# Altium PCB Copy-of-PCB1.pcbdoc
Units mm, origin at the board's own origin, x right, y up, seen from the top; angles counter-clockwise.
Board outline 151.76 x 115.06 mm, 2 copper layers (Top Layer, Bottom Layer); 14 components, 7 nets, 30 pads, 3 vias.
Unrouted connection lines stored in the file: 15.
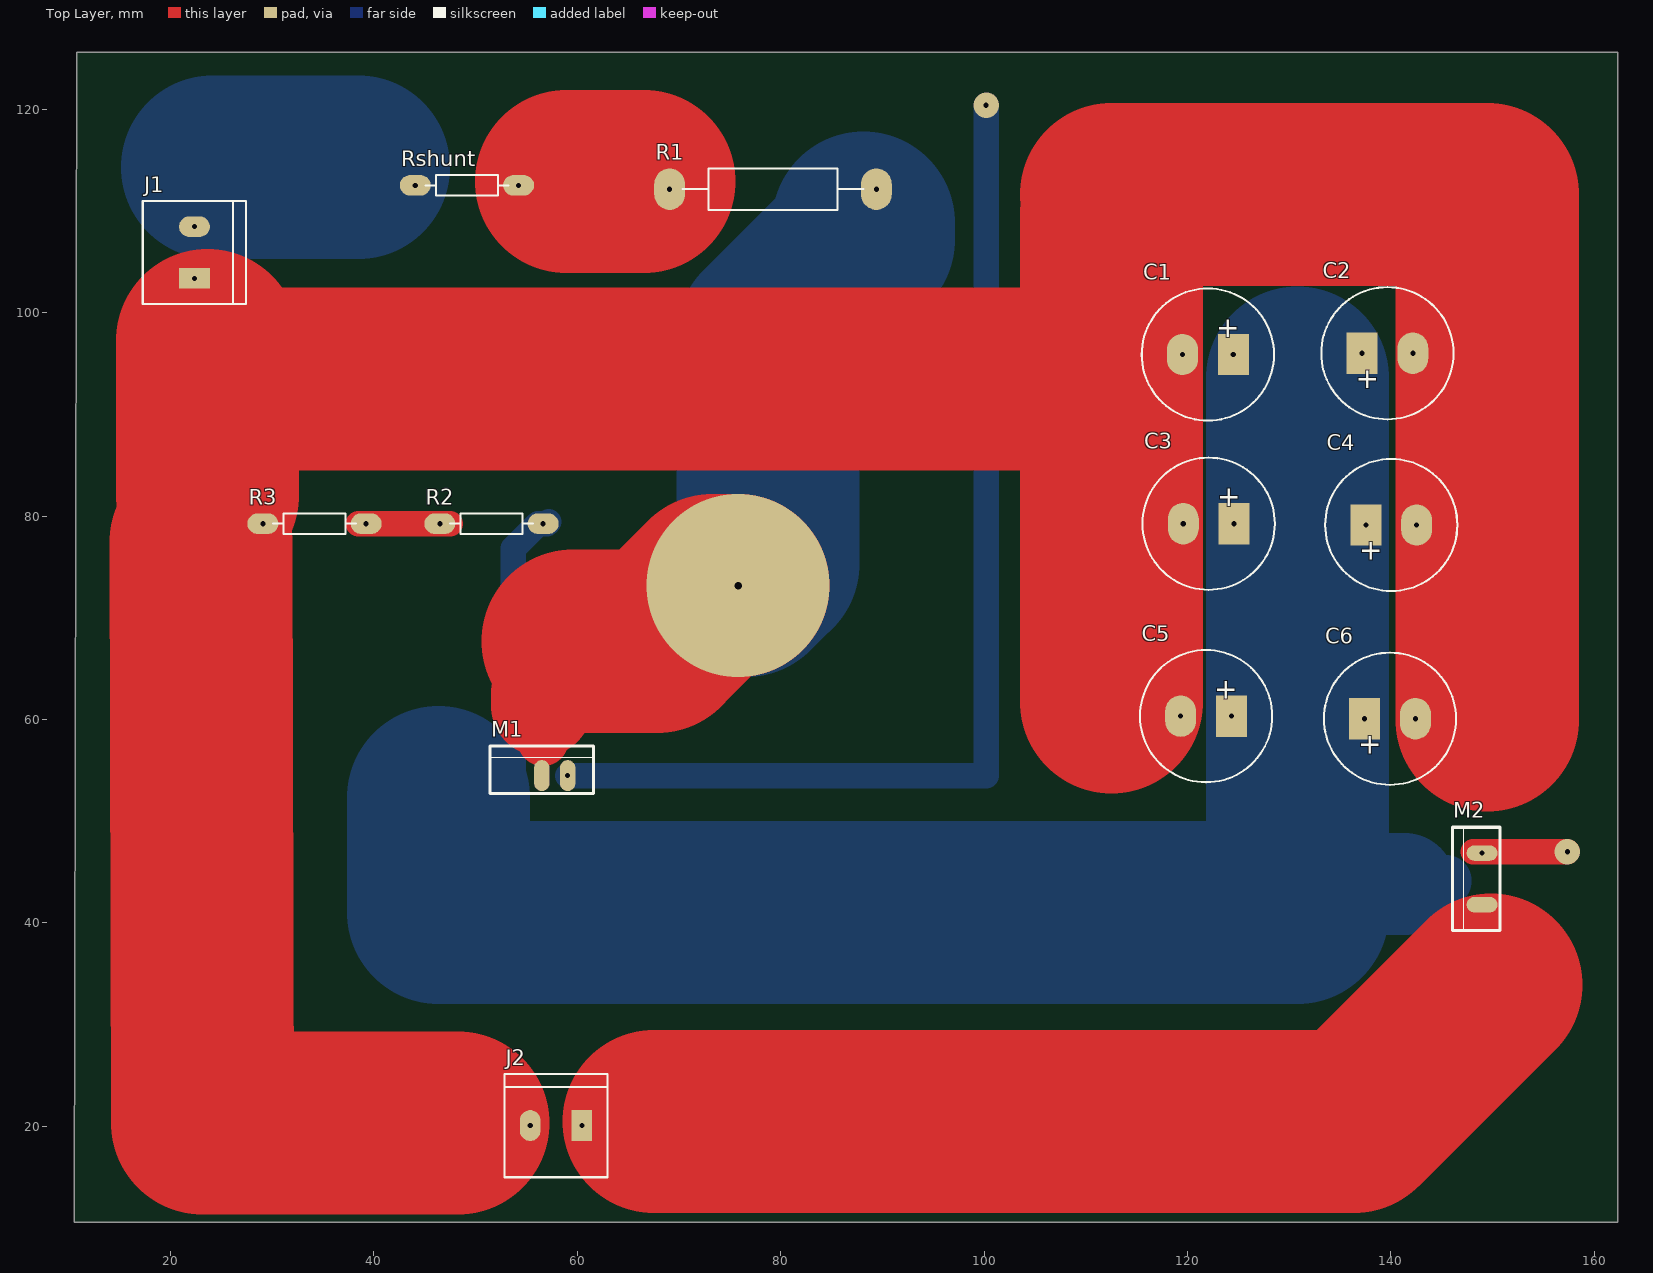
[diagram p0: Top Layer view]
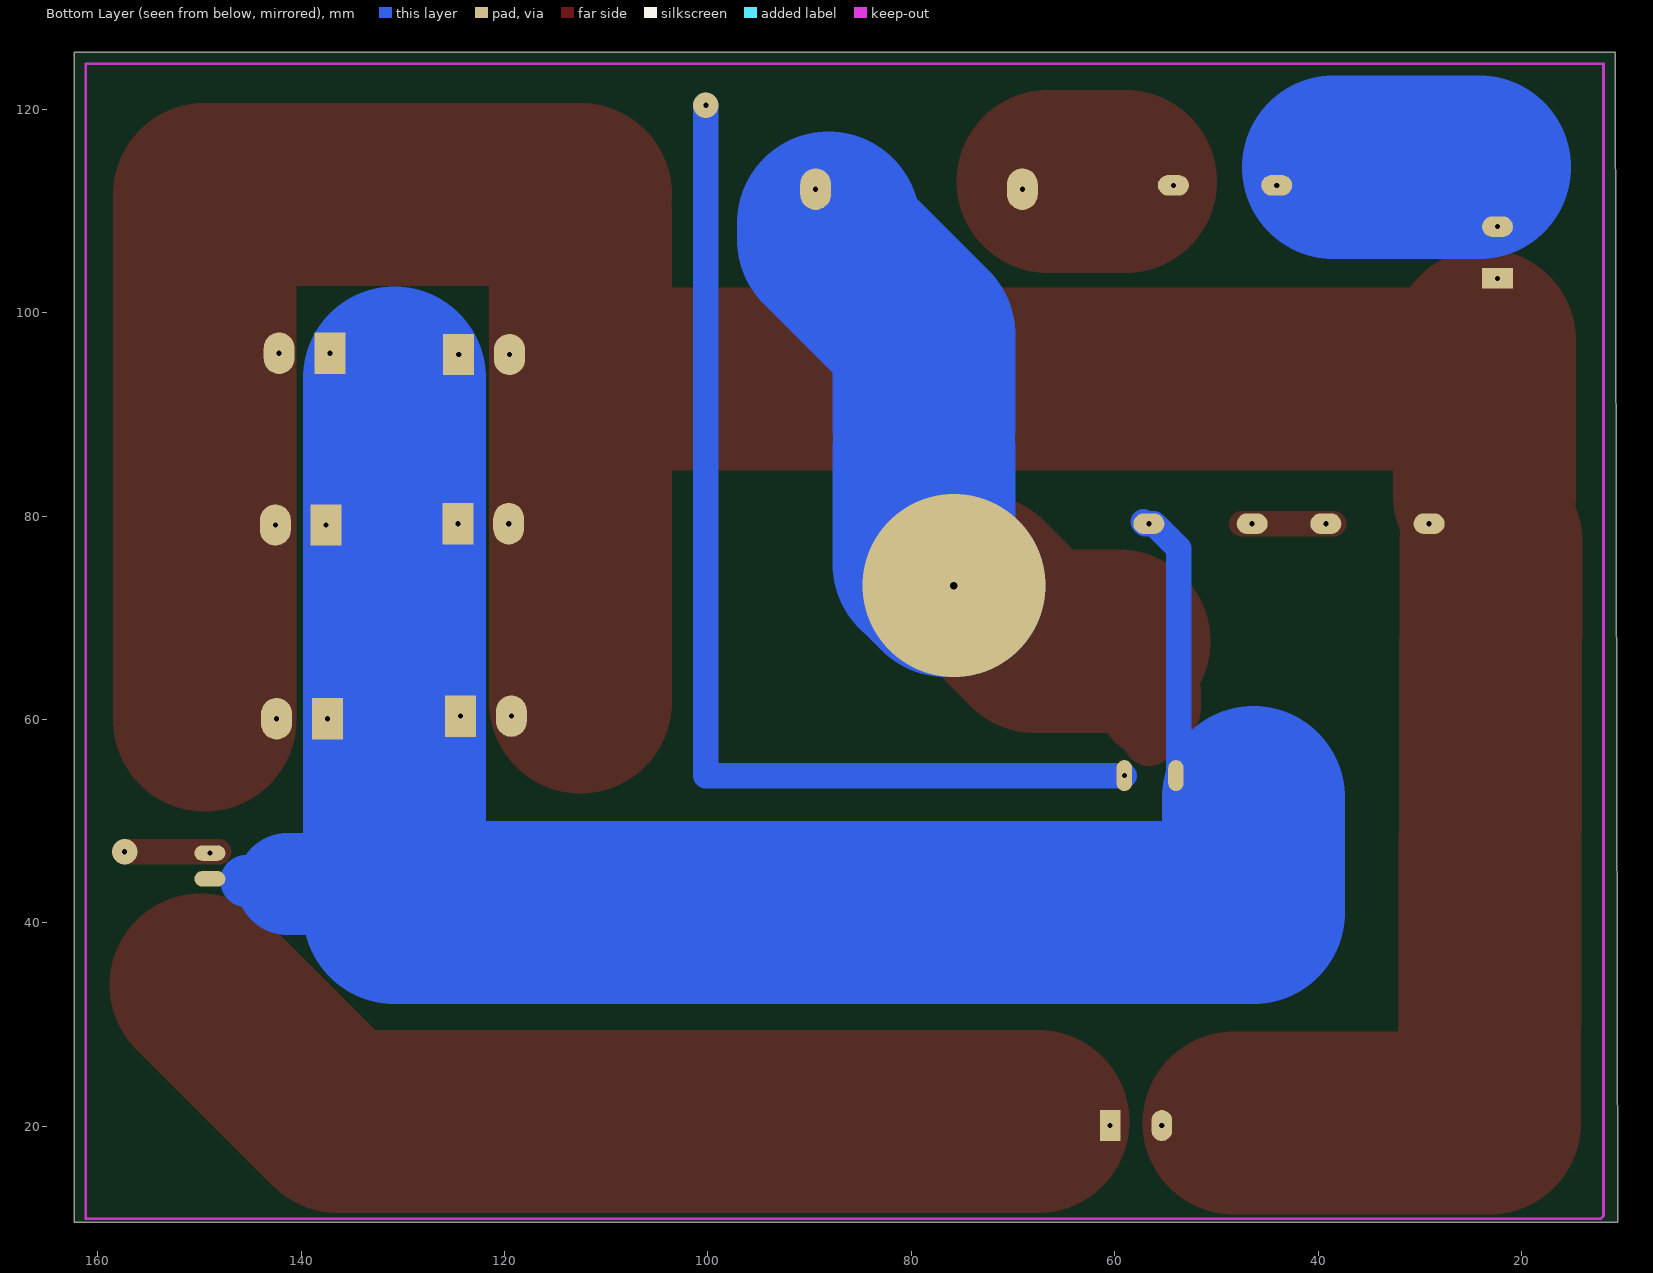
[diagram p1: Bottom Layer view, seen from below]

## Layer stack, top to bottom
Top Solder: solder mask 0.0102, Solder Resist, Dk 3.5
Top Layer: signal copper 0.0356
Dielectric 1: dielectric 0.32, FR-4, Dk 4.8
Bottom Layer: signal copper 0.0356
Bottom Solder: solder mask 0.0102, Solder Resist, Dk 3.5

## Board outline
10.789,125.603 162.306,125.603 162.306,10.541 10.541,10.541

## Design rules (kind name [scope] priority, off if disabled: settings)
Clearance [All] p1 off: gap=0.254 ignorepadtopadclearanceinfootprint=FALSE except(0: Arc-Hole Track-Hole SMDPad-Hole THPad-Hole Via-Hole Fill-Hole Poly-Hole Region-Hole Text-Hole)
PolygonConnect [All] p1: connectstyle=Relief reliefconductorwidth=0.254 reliefentries=4 polygonreliefangle="90 Angle" airgapwidth=0.254
RoutingVias [All] p1: holewidth=0.711 width=1.27 viastyle="Through Hole" minholewidth=0.711 minwidth=1.27 maxholewidth=0.711 maxwidth=1.27
ShortCircuit [All] p1 off: allowed=FALSE
SolderMaskExpansion [All] p1: expansion=0.102
Width [All] p1: maxlimit=18 minlimit=2 preferedwidth=18 minimp=50.000000 maximp=50.000000 favimp=50.000000
29 further rules are at their usual default settings.

## Components (designator, comment, footprint, x,y, rotation, side; value= is the part's Value field where it differs from the comment)
C1 "Cond pol radial" CAPPR7.5-16x35 124.507,95.885 r180 top value=470µF
C2 "Cond pol radial" CAPPR7.5-16x35 137.16,96.012 r0 top value=470µF
C3 "Cond pol radial" CAPPR7.5-16x35 124.587,79.248 r180 top value=470µF
C4 "Cond pol radial" CAPPR7.5-16x35 137.541,79.121 r0 top value=470µF
C5 "Cond pol radial" CAPPR7.5-16x35 124.333,60.325 r180 top value=470µF
C6 "Cond pol radial" CAPPR7.5-16x35 137.414,60.071 r0 top value=470µF
J1 "Connecteur 2" CONVIS-2 22.352,103.378 r90 top
J2 "Connecteur 2" CONVIS-2 60.452,20.066 r180 top
M1 "MOSFET-N" "TO-220 V"#1 53.975,54.483 r0 top value=NMOS
M2 "MOSFET-N" "TO-220 V"#2 148.971,41.783 r90 top value=NMOS
R1 "Résistance" AXIAL-0.8 69.088,112.141 r0 top value=270ohm
R2 "Résistance" AXIAL-0.4 46.482,79.248 r0 top
R3 "Résistance" AXIAL-0.4 29.083,79.248 r0 top
Rshunt "Résistance" AXIAL-0.4 44.069,112.522 r0 top value=1ohm

## Footprints (in the part's own frame and the unit in brackets; to place one, negate y for a bottom-side part, rotate by r counter-clockwise, add the part's x,y. Pads: shape width x height; smd on the part's side, far side on the other; paste and mask are expansions set on the pad)
AXIAL-0.4 [mil] "Resistor; 2 Leads"
  oval 120x80 hole 19.68: 1(0,0) 2(400,0)
  silkscreen extent 40,-40 360,40
AXIAL-0.8 [mil] "Adjustable Inductor; 2 Leads"
  oval 120x160 hole 19.68: 1(0,0) 2(800,0)
  silkscreen extent 50,-80 750,80
CAPPR7.5-16x35 [mil] "Capacitor, Electrolytic, Radial; Body 16 x 35 mm (Dia.xH typ); Pin Spacing 7.5 mm (typ)"
  rect 120x160 hole 19.68: 1(0,0)
  oval 120x160 hole 19.68: 2(196.85,0)
  silkscreen extent -157,-256 354,256
CONVIS-2 [mil] "Connecteur à vis 2 contacts Pitch 5.08"
  rect 80x120 hole 19.68: 1(0,0)
  oval 80x120 hole 19.68: 2(200,0)
  silkscreen extent -100,-200 300,200
"TO-220 V"#1 [mil] "TO-220 Vertical"
  oval 60x120 smd far side: 1(0,0)
  oval 60x120 smd: 2(100,0)
  oval 60x120 hole 19.68: 3(200,0)
  silkscreen extent -100,-70 300,115
"TO-220 V"#2 [mil] "TO-220 Vertical"
  oval 60x120 smd: 1(0,0)
  oval 60x120 smd far side: 2(100,0)
  oval 60x120 hole 19.68: 3(200,0)
  silkscreen extent -100,-70 300,115

## Part data
C1 C2 C3 C4 C5 C6: "Condensateur polatisé", Designer="ECAM 2004", Type="Condensateur polarisé debout"
J1 J2: "Connecteur", Designer="ECAM 2005", Type="Connecteur à vis"
M1 M2: "MOSFET", Designer="ECAM 2002", Type="Mosfet canal N"
R1 R2 R3 Rshunt: "Résistance standard", Designer="ECAM 2005", Type="Résistance standard"

## Via types
v1: diameter 2.5, hole 0.5, Top Layer to Bottom Layer, 2 vias
v2: diameter 18, hole 0.711, Top Layer to Bottom Layer, 1 vias

## Nets (pads, with @x,y where several pads share a name; then routed paths per layer and width w, separated by ;. In a path a pad name is that pad's centre, name@x,y a point inside that pad or via, vN(x,y) a via of type N, cw(c..) or ccw(c..) an arc to the next point about the centre after c; other vN are vias at no path point)
GND: C1.2 C2.2 C3.2 C4.2 C5.2 C6.2 J1.1 J2.2 R3.1 | length 97.5
  Top Layer w18: 22.987,77.47 23.124,20.32 48.26,20.32 ; 23.622,82.042 23.622,97.282
NetC1_1: C1.1 C2.1 C3.1 C4.1 C5.1 C6.1 M1.1 M2.2 R2.2 | length 26.9
  Bottom Layer w2.5: M1.1@53.721,54.483 53.721,76.835 56.134,79.248 R2.2 57.023,79.248 R2.2@57.213,79.438
NetJ1_2: J1.2 Rshunt.1 | length 14.4
  Bottom Layer w18: 24.13,114.3 38.481,114.3
NetJ2_1: J2.1 M2.1 | length 87.9
  Top Layer w18: 67.564,20.447 133.731,20.447 136.398,20.447 149.86,33.909
NetM1_2: M1.2 R1.2 | length 58
  Top Layer w0: v2@75.819,72.771 v2(75.819,73.152)
  Top Layer w18: 59.563,67.691 67.818,67.691 73.279,73.152 v2(75.819,73.152)
  Bottom Layer w18: v2(75.819,73.152) 76.581,73.152 78.74,75.311 78.74,86.614 ; 78.74,88.773 78.74,97.79 88.138,107.188 88.138,108.839
NetR1_1: R1.1 Rshunt.2 | length 7.6
  Top Layer w18: 58.928,112.903 66.548,112.903
NetR2_1: R2.1 R3.2 | length 11.3
  Top Layer w2.5: R3.2@38.481,79.248 R2.1@47.498,79.248
  Top Layer w5: 56.642,57.912 56.642,58.928
  Top Layer w10: 56.515,61.341 56.515,62.611
pads on no net: M1.3 M2.3
copper on no net: | length 480.9
  Top Layer w2.5: 148.082,46.99 v1(157.353,46.99)
  Top Layer w18: 23.622,93.472 104.902,93.472 ; 112.522,61.722 112.522,109.728 ; 112.522,111.633 149.479,111.633 149.479,59.944
  Bottom Layer w2.5: 59.055,54.483 100.076,54.483 ; 100.203,54.483 v1(100.203,120.396)
  Bottom Layer w5: 145.415,44.069 145.415,44.196
  Bottom Layer w10: 138.557,43.815 141.351,43.815
  Bottom Layer w18: 46.355,52.324 46.355,41.021 130.81,41.021 ; 130.81,45.466 130.81,93.599

## Keep-outs
Bottom Layer:
  lines w0.254: 9.398,205.232 11.43,205.232 ; 283.591,9.779 284.099,10.287 284.099,11.811 ; 11.938,11.176 11.938,44.704 11.938,124.46 12.192,124.46 159.766,124.46 161.163,124.46 161.163,10.922 12.192,10.922 11.938,11.176

## Text inside footprints (layer, text, board x,y; h text height)
C1: Top Overlay "+" at 125.142,99.314 h2 r180
C2: Top Overlay "+" at 136.525,92.583 h2
C3: Top Overlay "+" at 125.222,82.677 h2 r180
C4: Top Overlay "+" at 136.906,75.692 h2
C5: Top Overlay "+" at 124.968,63.754 h2 r180
C6: Top Overlay "+" at 136.779,56.642 h2